# Altium PCB AfternoonCape_RevA2_ADImux.PcbDoc
Units mil, origin at the board's own origin, x right, y up, seen from the top; angles counter-clockwise.
Board outline 3400 x 2150 mil, 2 copper layers (Top Layer, Bottom Layer); 32 components, 108 nets, 343 pads, 63 vias.
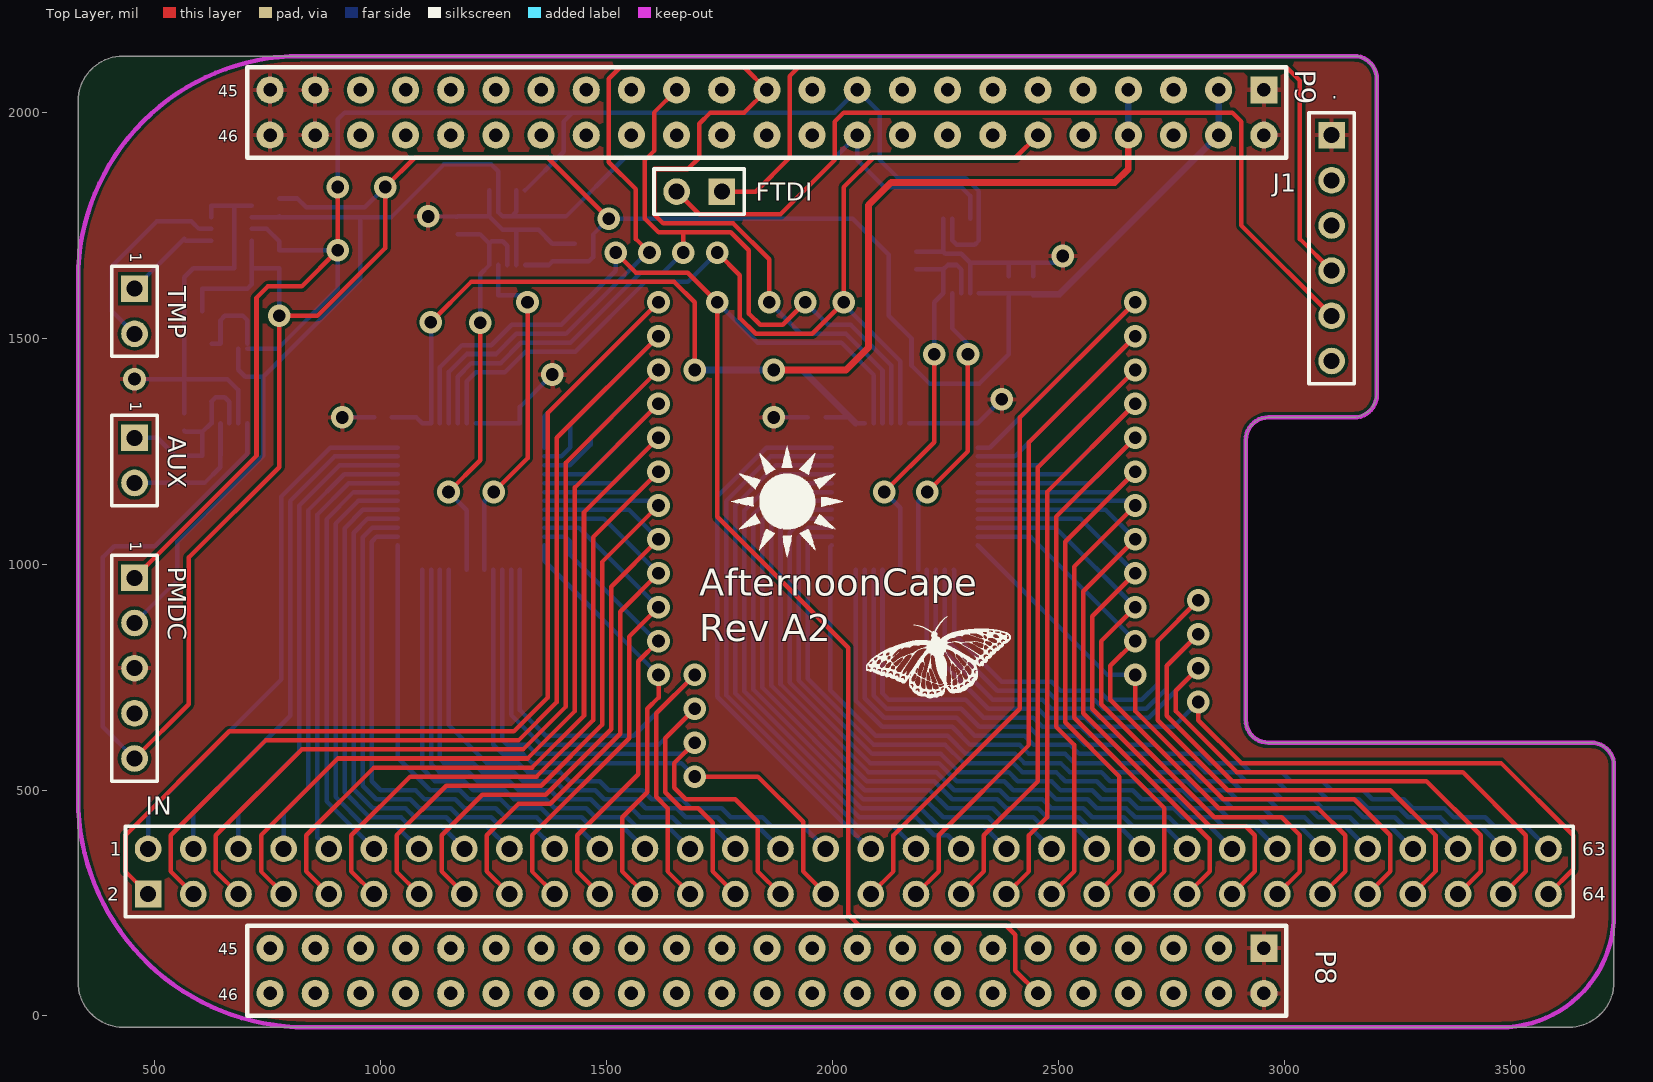
[diagram p0: Top Layer view]
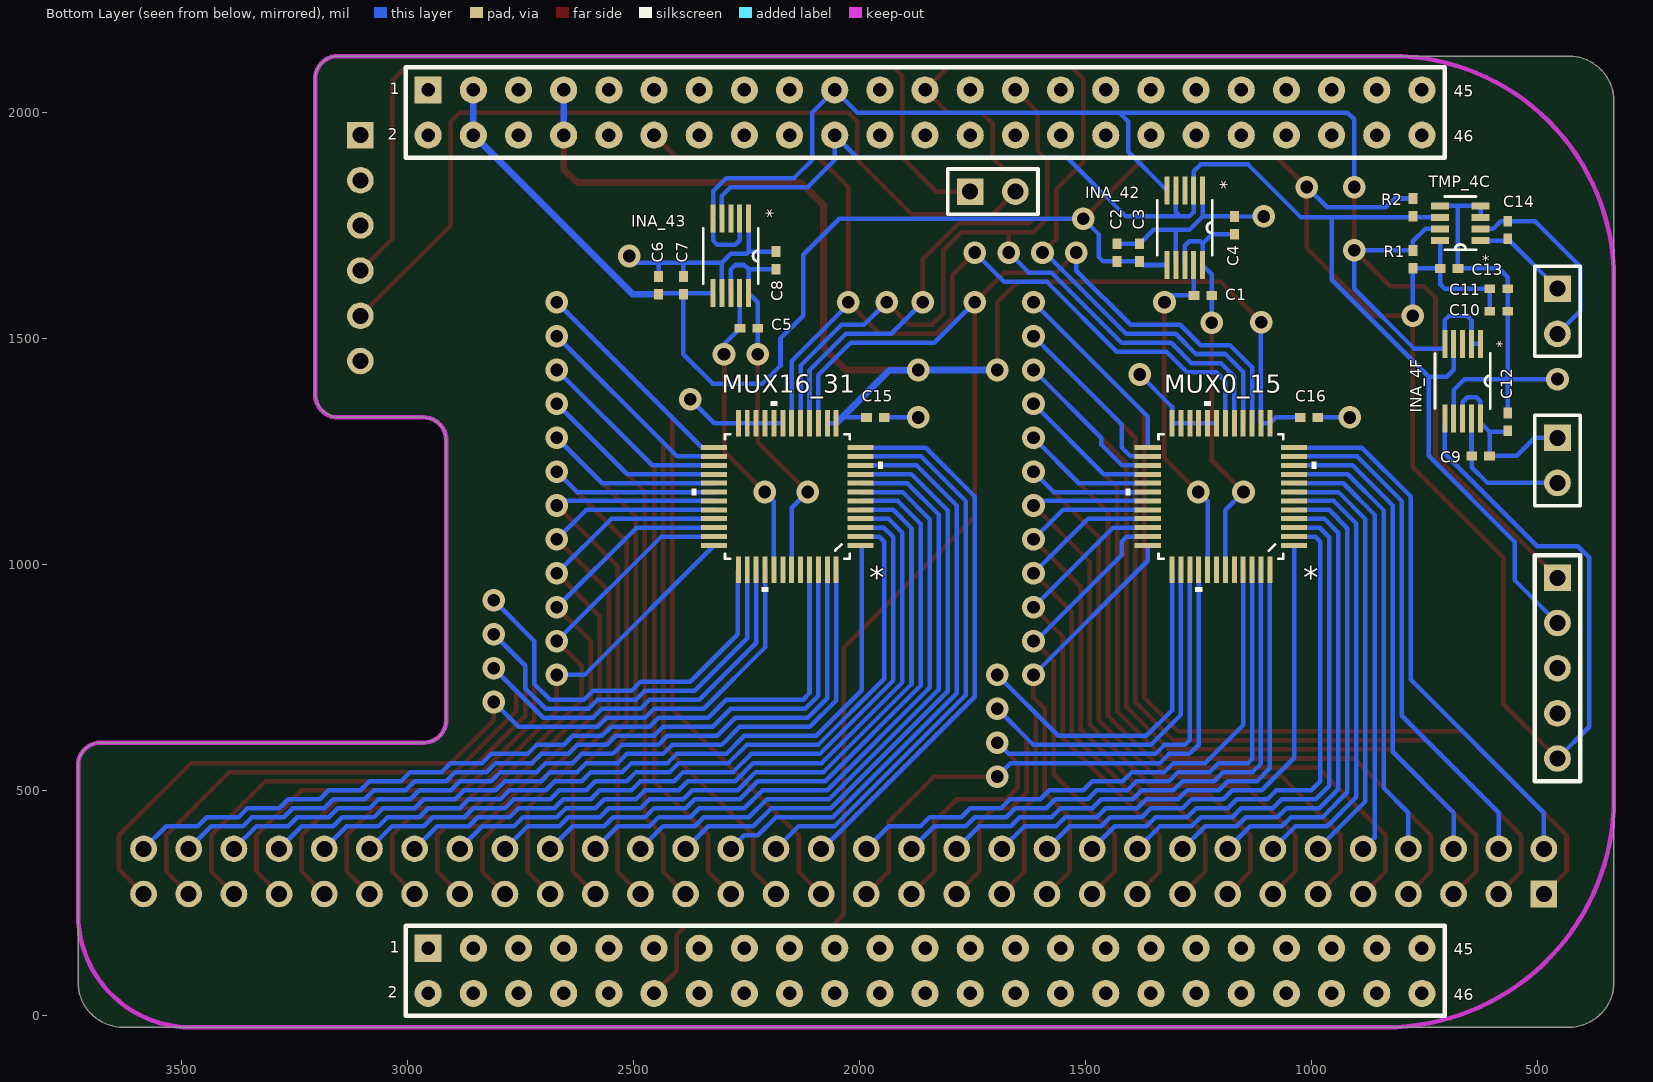
[diagram p1: Bottom Layer view, seen from below]

## Layer stack, top to bottom
Top Layer: signal copper 1.4
Dielectric: dielectric 12.6, FR-4, Dk 4.8
Bottom Layer: signal copper 1.4

## Board outline
3150,2125 3155,2125 cw(c3155,2075) 3205,2075 3205,1380 cw(c3150,1380) 3150,1325 2965,1325 ccw(c2965,1275) 2915,1275 2915,665 2915,655 ccw(c2965,655) 2965,605 3670,605 3680,605 cw(c3680,555) 3730,555 3730,75 cw(c3630,75) 3630,-25 3480,-25 430,-25 cw(c430,75) 330,75 330,530 330,2025 cw(c430,2025) 430,2125 845,2125 3150,2125

## Design rules (kind name [scope] priority, off if disabled: settings)
Clearance [All] p1: gap=7
MinimumSolderMaskSliver [All] p1: minsoldermaskwidth=0
PolygonConnect [All] p1: connectstyle=Relief reliefconductorwidth=10 reliefentries=4 polygonreliefangle="90 Angle"
RoomDefinition AfternoonCape_RevA2_ADImux [InComponentClass('AfternoonCape_RevA2_ADImux')] p1: confinementstyle=ConfineIn formatcopy=TRUE lockcomponents=FALSE outline -190,-755 4780,-755 4780,3205 -190,3205
RoutingVias [All] p1: holewidth=28 width=50 viastyle="Through Hole" minholewidth=28 minwidth=50 maxholewidth=28 maxwidth=50
SilkscreenOverComponentPads [All] p1: minsilkscreentomaskgap=10
SolderMaskExpansion [All] p1: expansion=4
Width [All] p1: maxlimit=20 minlimit=10 preferedwidth=10
26 further rules are at their usual default settings.

## Components (designator, comment, footprint, x,y, rotation, side; value= is the part's Value field where it differs from the comment)
AUX "Header 2" HDR1X2 455,1280 r270 top
C1 "Cap Semi" 0402 1240,1595 r180 bottom
C2 "Cap Semi" 0402 1430,1690 r270 bottom
C3 "Cap Semi" 0402 1380,1690 r270 bottom
C4 "Cap Semi" 0402 1170,1750 r270 bottom
C5 "Cap Semi" 0402 2245,1522.5 r180 bottom
C6 "Cap Semi" 0402 2445,1617.5 r270 bottom
C7 "Cap Semi" 0402 2390,1617.5 r270 bottom
C8 "Cap Semi" 0402 2185,1672.5 r270 bottom
C9 "Cap Semi" 0402 625,1240 r180 bottom
C10 "Cap Semi" 0402 585,1560 r0 bottom
C11 "Cap Semi" 0402 585,1610 r0 bottom
C12 "Cap Semi" 0402 565,1315 r270 bottom
C13 "Cap Semi" 0402 695,1655 r0 bottom
C14 "Cap Semi" 0402 565,1740 r270 bottom
C15 "Cap Semi" 0402 1965,1325 r0 bottom
C16 "Cap Semi" 0402 1005,1325 r0 bottom
FTDI "Header 2" HDR1X2 1755,1825 r180 top
IN "Header 32x2" HDR2X32 485,270 r0 top
INA_4F "INA226" DGS10 665,1405.63 r270 bottom
INA_42 "INA226" DGS10 1280,1745 r270 bottom
INA_43 "INA226" DGS10 2285,1682.5 r270 bottom
J1 "Header 6" HDR1X6 3105,1950 r270 top
MUX0_15 "ADG726BSUZ" SU_48 1200,1150 r0 bottom
MUX16_31 "ADG726BSUZ" SU_48 2160,1150 r0 bottom
P8 "FEMALE HEADER 2x23" HEADER23X2 1855,100 r180 top
P9 "FEMALE HEADER 2x23" HEADER23X2 1855,2000 r180 top
PMDC "Header 5" HDR1X5 455,970 r270 top
R1 "Res3" 0402 775,1675 r270 bottom
R2 "Res3" 0402 775,1790 r90 bottom
TMP "Header 2" HDR1X2 455,1610 r270 top
TMP_4C "TMP441_DCN_8" DCN8-L 670,1755 r0 bottom

## Footprints (in the part's own frame and the unit in brackets; to place one, negate y for a bottom-side part, rotate by r counter-clockwise, add the part's x,y. Pads: shape width x height; smd on the part's side, far side on the other; paste and mask are expansions set on the pad)
0402 [mm] "Chip Capacitor, Body 1.0x0.5mm, IPC High Density"
  rect 0.6x0.5 smd: 1(-0.5,0) 2(0.5,0)
  body extent -0.55,-0.3 0.55,0.3, height 1.3
DCN8-L [mil]
  rect 40x15 smd: 1(-45,38.39) 2(-45,12.8) 3(-45,-12.8) 4(-45,-38.39) 5(45,-38.39) 6(45,-12.8) 7(45,12.8) 8(45,38.39)
  silkscreen extent -34,-59 35,59
DGS10 [mil]
  rect 62x11 smd: 1(-82.5,39.37) 2(-82.5,19.68) 3(-82.5,0) 4(-82.5,-19.68) 5(-82.5,-39.37) 6(82.5,-39.37) 7(82.5,-19.68) 8(82.5,0) 9(82.5,19.68) 10(82.5,39.37)
  silkscreen extent -61,-61 61,61, body extent -96,-59 97,59, height 37
HDR1X2 [mm] "Connector; Header; 2 Position"
  rect 1.5x1.5 hole 0.9: 1(0,0)
  round 1.5 hole 0.9: 2(2.54,0)
  silkscreen extent -1.27,-1.27 3.81,1.27
HDR1X5 [mm] "Connector; Header; 5 Position"
  rect 1.5x1.5 hole 0.9: 1(0,0)
  round 1.5 hole 0.9: 2(2.54,0) 3(5.08,0) 4(7.62,0) 5(10.16,0)
  silkscreen extent -1.27,-1.27 11.43,1.27
HDR1X6 [mm] "Connector; Header; 6 Position"
  rect 1.5x1.5 hole 0.9: 1(0,0)
  round 1.5 hole 0.9: 2(2.54,0) 3(5.08,0) 4(7.62,0) 5(10.16,0) 6(12.7,0)
  silkscreen extent -1.27,-1.27 13.97,1.27
HDR2X32 [mm]
  rect 1.5x1.5 hole 0.9: 1(0,0)
  round 1.5 hole 0.9: 2(0,2.54) 3(2.54,0) 4(2.54,2.54) 5(5.08,0) 6(5.08,2.54) 7(7.62,0) 8(7.62,2.54) 9(10.16,0) 10(10.16,2.54) 11(12.7,0) 12(12.7,2.54) 13(15.24,0) 14(15.24,2.54) 15(17.78,0) 16(17.78,2.54) 17(20.32,0) 18(20.32,2.54) 19(22.86,0) 20(22.86,2.54) 21(25.4,0) 22(25.4,2.54) 23(27.94,0) 24(27.94,2.54) 25(30.48,0) 26(30.48,2.54) 27(33.02,0) 28(33.02,2.54) 29(35.56,0) 30(35.56,2.54) 31(38.1,0) 32(38.1,2.54) 33(40.64,0) 34(40.64,2.54) 35(43.18,0) 36(43.18,2.54) 37(45.72,0) 38(45.72,2.54) 39(48.26,0) 40(48.26,2.54) 41(50.8,0) 42(50.8,2.54) 43(53.34,0) 44(53.34,2.54) 45(55.88,0) 46(55.88,2.54) 47(58.42,0) 48(58.42,2.54) 49(60.96,0) 50(60.96,2.54) 51(63.5,0) 52(63.5,2.54) 53(66.04,0) 54(66.04,2.54) 55(68.58,0) 56(68.58,2.54) 57(71.12,0) 58(71.12,2.54) 59(73.66,0) 60(73.66,2.54) 61(76.2,0) 62(76.2,2.54) 63(78.74,0) 64(78.74,2.54)
  silkscreen extent -1.27,-1.27 80.14,3.81
HEADER23X2 [mil] "HEADER23X2"
  rect 60x60 hole 30 mask+2: 1(-1100,-50)
  round 60 hole 30 mask+2: 2(-1100,50) 3(-1000,-50) 4(-1000,50) 5(-900,-50) 6(-900,50) 7(-800,-50) 8(-800,50) 9(-700,-50) 10(-700,50) 11(-600,-50) 12(-600,50) 13(-500,-50) 14(-500,50) 15(-400,-50) 16(-400,50) 17(-300,-50) 18(-300,50) 19(-200,-50) 20(-200,50) 21(-100,-50) 22(-100,50) 23(0,-50) 24(0,50) 25(100,-50) 26(100,50) 27(200,-50) 28(200,50) 29(300,-50) 30(300,50) 31(400,-50) 32(400,50) 33(500,-50) 34(500,50) 35(600,-50) 36(600,50) 37(700,-50) 38(700,50) 39(800,-50) 40(800,50) 41(900,-50) 42(900,50) 43(1000,-50) 44(1000,50) 45(1100,-50) 46(1100,50)
  silkscreen extent -1150,-100 1150,100
SU_48 [mil]
  rect 58x11 smd mask+5: 1(-162,108.27) 2(-162,88.58) 3(-162,68.9) 4(-162,49.21) 5(-162,29.53) 6(-162,9.84) 7(-162,-9.84) 8(-162,-29.53) 9(-162,-49.21) 10(-162,-68.9) 11(-162,-88.58) 12(-162,-108.27) 25(162,-108.27) 26(162,-88.58) 27(162,-68.9) 28(162,-49.21) 29(162,-29.53) 30(162,-9.84) 31(162,9.84) 32(162,29.53) 33(162,49.21) 34(162,68.9) 35(162,88.58) 36(162,108.27)
  rect 11x58 smd mask+5: 13(-108.27,-162) 14(-88.58,-162) 15(-68.9,-162) 16(-49.21,-162) 17(-29.53,-162) 18(-9.84,-162) 19(9.84,-162) 20(29.53,-162) 21(49.21,-162) 22(68.9,-162) 23(88.58,-162) 24(108.27,-162) 37(108.27,162) 38(88.58,162) 39(68.9,162) 40(49.21,162) 41(29.53,162) 42(9.84,162) 43(-9.84,162) 44(-29.53,162) 45(-49.21,162) 46(-68.9,162) 47(-88.58,162) 48(-108.27,162)
  silkscreen extent -211,-211 211,211

## Part data
AUX FTDI TMP: "Header, 2-Pin"
C1 C2 C3 C4 C5 C6 C7 C8 C9 C10 C11 C12 C13 C14 C15 C16: "Capacitor (Semiconductor SIM Model)"
IN: "Header, 32-Pin, Dual row"
J1: "6-pin female header, long legs for FTDI-USB cable"
MUX0_15 MUX16_31 TMP_4C: "Imported"
P8 P9: library part HDR_46_F_2_0.1_0.1, "CONN HEADER FMAL 46PS.1\" DL GOLD"
PMDC: "Header, 5-Pin"
R1 R2: "Resistor"

## Via types
v1: diameter 50, hole 28, Top Layer to Bottom Layer, 63 vias

## Nets (pads, with @x,y where several pads share a name; then routed paths per layer and width w, separated by ;. In a path a pad name is that pad's centre, name@x,y a point inside that pad or via, vN(x,y) a via of type N, cw(c..) or ccw(c..) an arc to the next point about the centre after c; other vN are vias at no path point)
AIN0: P9.39
AIN1: P9.40
AIN2: P9.37
AIN3: P9.38
ALERT: PMDC.4
AUX_N: AUX.2 C9.1 INA_4F.9 | length 302.1
  Bottom Layer w10: AUX.2 610,1180 644.68,1214.68 C9.1 645.32,1240.63 INA_4F.9@645.32,1312.5
AUX_P: AUX.1 C9.2 C12.2 INA_4F.8 INA_4F.10 | length 432.3
  Bottom Layer w10: AUX.1 505,1280 545,1240 C9.2 605.31,1293 ; C12.2 567.32,1293 605.31,1293 ; INA_4F.10@624.82,1312.5 605.31,1293 ; INA_4F.10@625.63,1312.5 625.63,1359.37 625,1360 635,1370 655,1370 665,1360 INA_4F.8@665,1312.5
B_UART0_RX: FTDI.1 J1.4 | length 1960.8
  Top Layer w10: FTDI.1 1830,1825 1905,1900 1905,2080 1925,2100 3005,2100 3035,2070 3035,1720 J1.4
B_UART0_TX: FTDI.2 J1.5 | length 1934.8
  Top Layer w10: FTDI.2 1705,1775 1885,1775 2005,1895 2005,1980 2025,2000 2885,2000 2905,1980 2905,1750 J1.5
CH0_N: IN.1 MUX0_15.25 | length 2615.1
  Top Layer w10: IN.1 435,320 435,400 665,630 1295,630 1370,705 1370,1335 v1(1615,1580)
  Bottom Layer w10: MUX0_15.25 1362,1327 v1(1615,1580)
CH0_P: IN.2 MUX0_15.12 | length 1205
  Bottom Layer w10: IN.2 485,450 780,745 780,1150 888.27,1258.27 MUX0_15.12
CH1_N: IN.3 MUX0_15.26 | length 2424.3
  Top Layer w10: IN.3 535,320 535,400 745,610 1305,610 1390,695 1390,1280 v1(1615,1505)
  Bottom Layer w10: MUX0_15.26 1399.54,1238.58 1420,1259.04 1420,1310 v1(1615,1505)
CH1_P: IN.4 MUX0_15.11 | length 1137.9
  Bottom Layer w10: IN.4 585,450 800,665 800,1140 898.58,1238.58 MUX0_15.11
CH2_N: IN.5 MUX0_15.27 | length 2222.9
  Top Layer w10: IN.5 635,320 635,400 825,590 1315,590 1410,685 1410,1225 v1(1615,1430)
  Bottom Layer w10: MUX0_15.27 1418.9,1218.9 1465,1265 1465,1280 v1(1615,1430)
CH2_P: IN.6 MUX0_15.10 | length 1070.7
  Bottom Layer w10: IN.6 685,450 820,585 820,1130 908.9,1218.9 MUX0_15.10
CH3_N: IN.7 MUX0_15.28 | length 2033.8
  Top Layer w10: IN.7 735,320 735,400 905,570 1325,570 1430,675 1430,1170 v1(1615,1355)
  Bottom Layer w10: MUX0_15.28 1459.21,1199.21 v1(1615,1355)
CH3_P: IN.8 MUX0_15.9 | length 1003.6
  Bottom Layer w10: IN.8 785,450 840,505 840,1120 919.21,1199.21 MUX0_15.9
CH4_N: IN.9 MUX0_15.29 | length 1853.4
  Top Layer w10: IN.9 835,320 835,400 985,550 1335,550 1450,665 1450,1115 v1(1615,1280)
  Bottom Layer w10: MUX0_15.29 1514.53,1179.53 v1(1615,1280)
CH4_P: IN.10 MUX0_15.8 | length 957.2
  Bottom Layer w10: IN.10 860,395 860,1110 929.53,1179.53 MUX0_15.8
CH5_N: IN.11 MUX0_15.30 | length 1673.1
  Top Layer w10: IN.11 935,320 935,400 1065,530 1345,530 1470,655 1470,1060 v1(1615,1205)
  Bottom Layer w10: MUX0_15.30 1569.84,1159.84 v1(1615,1205)
CH5_P: IN.12 MUX0_15.7 | length 956.3
  Bottom Layer w10: IN.12 880,475 880,1100 939.84,1159.84 MUX0_15.7
CH6_N: IN.13 MUX0_15.31 | length 1501.2
  Top Layer w10: IN.13 1035,320 1035,400 1145,510 1355,510 1490,645 1490,1005 v1(1615,1130)
  Bottom Layer w10: MUX0_15.31 1604.84,1140.16 v1(1615,1130)
CH6_P: IN.14 MUX0_15.6 | length 996.4
  Bottom Layer w10: MUX0_15.6 950.16,1140.16 900,1090 900,485 965,420 1035,420 IN.14
CH7_N: IN.15 MUX0_15.32 | length 1366.7
  Top Layer w10: IN.15 1135,320 1135,400 1225,490 1365,490 1510,635 1510,950 v1(1615,1055)
  Bottom Layer w10: MUX0_15.32 1549.53,1120.47 v1(1615,1055)
CH7_P: IN.16 MUX0_15.5 | length 1036.5
  Bottom Layer w10: MUX0_15.5 960.47,1120.47 920,1080 920,495 975,440 1045,440 1065,420 1135,420 IN.16
CH8_N: IN.17 MUX0_15.33 | length 1232.1
  Top Layer w10: IN.17 1235,320 1235,400 1305,470 1375,470 1530,625 1530,895 v1(1615,980)
  Bottom Layer w10: MUX0_15.33 1494.21,1100.79 v1(1615,980)
CH8_P: IN.18 MUX0_15.4 | length 1078.4
  Bottom Layer w10: MUX0_15.4 970.79,1100.79 940,1070 940,502 982,460 1055,460 1075,440 1145,440 1165,420 1235,420 IN.18
CH9_N: IN.19 MUX0_15.34 | length 1097.6
  Top Layer w10: IN.19 1335,320 1335,400 1550,615 1550,840 v1(1615,905)
  Bottom Layer w10: MUX0_15.34 1438.9,1081.1 v1(1615,905)
CH9_P: IN.20 MUX0_15.3 | length 1119.7
  Bottom Layer w10: MUX0_15.3 981.1,1081.1 960,1060 960,510 990,480 1065,480 1085,460 1155,460 1175,440 1245,440 1265,420 1335,420 IN.20
CH10_N: IN.21 MUX0_15.35 | length 1021.7
  Top Layer w10: IN.21 1435,320 1435,400 1570,535 1570,785 v1(1615,830)
  Bottom Layer w10: MUX0_15.35 1408.58,1061.42 1420,1050 1420,1020 1610,830 v1(1615,830)
CH10_P: IN.22 MUX0_15.2 | length 1159.9
  Bottom Layer w10: MUX0_15.2 991.42,1061.42 980,1050 980,520 1000,500 1077,500 1097,480 1165,480 1185,460 1255,460 1275,440 1345,440 1365,420 1435,420 IN.22
CH11_N: IN.23 MUX0_15.36 | length 930.4
  Top Layer w10: IN.23 1535,320 1535,440 1590,495 1590,680 1615,705 v1(1615,755)
  Bottom Layer w10: MUX0_15.36 1362,1008 v1(1615,755)
CH11_P: IN.24 MUX0_15.1 | length 1100.4
  Bottom Layer w10: MUX0_15.1 1038,572 1110,500 1175,500 1195,480 1265,480 1285,460 1355,460 1375,440 1445,440 1465,420 1535,420 IN.24
CH12_N: IN.25 MUX0_15.37 | length 1328.7
  Top Layer w10: IN.25 1635,320 1635,460 1610,485 1610,670 v1(1695,755)
  Bottom Layer w10: MUX0_15.37 1308.27,676.73 1365,620 1560,620 v1(1695,755)
CH12_P: IN.26 MUX0_15.48 | length 1106.8
  Bottom Layer w10: MUX0_15.48 1091.73,548.27 1120,520 1185,520 1205,500 1275,500 1295,480 1365,480 1385,460 1455,460 1475,440 1545,440 1565,420 1635,420 IN.26
CH13_N: IN.27 MUX0_15.38 | length 1312
  Top Layer w10: v1(1695,680) 1630,615 1630,495 1665,460 1703,460 1735,428 1735,320 IN.27
  Bottom Layer w10: MUX0_15.38 1288.58,666.42 1355,600 1615,600 v1(1695,680)
CH13_P: IN.28 MUX0_15.47 | length 1181.1
  Bottom Layer w10: MUX0_15.47 1111.42,558.58 1130,540 1195,540 1215,520 1285,520 1305,500 1375,500 1395,480 1465,480 1485,460 1555,460 1575,440 1645,440 1665,420 1735,420 IN.28
CH14_N: IN.29 MUX0_15.39 | length 1341.7
  Top Layer w10: v1(1695,605) 1650,560 1650,505 1675,480 1785,480 1835,430 1835,320 IN.29
  Bottom Layer w10: MUX0_15.39 1268.9,611.1 1280,600 1325,600 1345,580 1670,580 v1(1695,605)
CH14_P: IN.30 MUX0_15.46 | length 1255.4
  Bottom Layer w10: MUX0_15.46 1131.1,568.9 1140,560 1205,560 1225,540 1295,540 1315,520 1387,520 1407,500 1475,500 1495,480 1567,480 1587,460 1655,460 1675,440 1745,440 1765,420 1835,420 IN.30
CH15_N: IN.31 MUX0_15.40 | length 1324.5
  Top Layer w10: v1(1695,530) 1835,530 1935,430 1935,320 IN.31
  Bottom Layer w10: MUX0_15.40 1249.21,600.79 1270,580 1315,580 1335,560 1665,560 v1(1695,530)
CH15_P: IN.32 MUX0_15.45 | length 1291.6
  Bottom Layer w10: MUX0_15.45 1150.79,644.21 1235,560 1305,560 1325,540 1397,540 1417,520 1485,520 1505,500 1580,500 1600,480 1667,480 1687,460 1755,460 1775,440 1845,440 1865,420 1935,420 IN.32
CH16_N: IN.33 MUX16_31.25 | length 2033.6
  Top Layer w10: IN.33 2135,320 2135,400 2415,680 2415,1325 v1(2670,1580)
  Bottom Layer w10: MUX16_31.25 2348.27,1258.27 v1(2670,1580)
CH16_P: IN.34 MUX16_31.12 | length 1220.7
  Bottom Layer w10: MUX16_31.12 1853.27,1258.27 1745,1150 1745,706.5 2081.5,370 IN.34
CH17_N: IN.35 MUX16_31.26 | length 1894.2
  Top Layer w10: IN.35 2235,320 2235,400 2435,600 2435,1270 v1(2670,1505)
  Bottom Layer w10: MUX16_31.26 2403.58,1238.58 v1(2670,1505)
CH17_P: IN.36 MUX16_31.11 | length 1264.3
  Bottom Layer w10: MUX16_31.11 1863.58,1238.58 1765,1140 1765,710.54 2055.54,420 2135,420 IN.36
CH18_N: IN.37 MUX16_31.27 | length 1754.9
  Top Layer w10: IN.37 2335,320 2335,400 2455,520 2455,1215 v1(2670,1430)
  Bottom Layer w10: MUX16_31.27 2458.9,1218.9 v1(2670,1430)
CH18_P: IN.38 MUX16_31.10 | length 1308
  Bottom Layer w10: MUX16_31.10 1873.9,1218.9 1785,1130 1785,714.58 2059.58,440 2185,440 2225,400 2255,400 IN.38
CH19_N: IN.39 MUX16_31.28 | length 1615.6
  Top Layer w10: IN.39 2435,320 2435,400 2475,440 2475,1160 v1(2670,1355)
  Bottom Layer w10: MUX16_31.28 2514.21,1199.21 v1(2670,1355)
CH19_P: IN.40 MUX16_31.9 | length 1351
  Bottom Layer w10: MUX16_31.9 1885.17,1199.21 1805,1119.04 1805,718.63 2063.63,460 2195,460 2235,420 2335,420 IN.40
CH20_N: IN.41 MUX16_31.29 | length 1509.4
  Top Layer w10: IN.41 2535,320 2535,600 2495,640 2495,1105 v1(2670,1280)
  Bottom Layer w10: MUX16_31.29 2569.53,1179.53 v1(2670,1280)
CH20_P: IN.42 MUX16_31.8 | length 1395.2
  Bottom Layer w10: MUX16_31.8 1894.53,1179.53 1825,1110 1825,722.67 2067.67,480 2205,480 2245,440 2345,440 2365,420 2435,420 IN.42
CH21_N: IN.43 MUX16_31.30 | length 1436.3
  Top Layer w10: IN.43 2635,320 2635,530 2515,650 2515,1050 v1(2670,1205)
  Bottom Layer w10: MUX16_31.30 2624.84,1159.84 v1(2670,1205)
CH21_P: IN.44 MUX16_31.7 | length 1438.8
  Bottom Layer w10: MUX16_31.7 1904.84,1159.84 1845,1100 1845,726.71 2071.71,500 2215,500 2255,460 2355,460 2375,440 2445,440 2465,420 2535,420 IN.44
CH22_N: IN.45 MUX16_31.31 | length 1371.7
  Top Layer w10: v1(2670,1130) 2535,995 2535,660 2735,460 2735,320 IN.45
  Bottom Layer w10: MUX16_31.31 2659.84,1140.16 v1(2670,1130)
CH22_P: IN.46 MUX16_31.6 | length 1482.5
  Bottom Layer w10: MUX16_31.6 1915.16,1140.16 1865,1090 1865,730.75 2075.75,520 2225,520 2265,480 2365,480 2385,460 2455,460 2475,440 2545,440 2565,420 2635,420 IN.46
CH23_N: IN.47 MUX16_31.32 | length 1344.4
  Top Layer w10: v1(2670,1055) 2555,940 2555,670 2835,390 2835,320 IN.47
  Bottom Layer w10: MUX16_31.32 2604.53,1120.47 v1(2670,1055)
CH23_P: IN.48 MUX16_31.5 | length 1526.1
  Bottom Layer w10: MUX16_31.5 1925.47,1120.47 1885,1080 1885,734.79 2079.79,540 2230,540 2270,500 2370,500 2390,480 2465,480 2485,460 2555,460 2575,440 2645,440 2665,420 2735,420 IN.48
CH24_N: IN.49 MUX16_31.33 | length 1364.1
  Top Layer w10: v1(2670,980) 2575,885 2575,680 2835,420 2915,420 2935,400 2935,320 IN.49
  Bottom Layer w10: MUX16_31.33 2549.21,1100.79 v1(2670,980)
CH24_P: IN.50 MUX16_31.4 | length 1569.7
  Bottom Layer w10: MUX16_31.4 1935.79,1100.79 1905,1070 1905,738.83 2083.83,560 2235,560 2275,520 2380,520 2400,500 2475,500 2495,480 2565,480 2585,460 2650,460 2670,440 2745,440 2765,420 2835,420 IN.50
CH25_N: IN.51 MUX16_31.34 | length 1377.8
  Top Layer w10: v1(2670,905) 2595,830 2595,690 2845,440 2995,440 3035,400 3035,320 IN.51
  Bottom Layer w10: MUX16_31.34 2493.9,1081.1 v1(2670,905)
CH25_P: IN.52 MUX16_31.3 | length 1613.3
  Bottom Layer w10: MUX16_31.3 1946.1,1081.1 1925,1060 1925,742.88 2087.88,580 2240,580 2280,540 2390,540 2410,520 2485,520 2505,500 2575,500 2595,480 2656,480 2676,460 2755,460 2775,440 2845,440 2865,420 2935,420 IN.52
CH26_N: IN.53 MUX16_31.35 | length 1391.6
  Top Layer w10: v1(2670,830) 2615,775 2615,700 2855,460 3075,460 3135,400 3135,320 IN.53
  Bottom Layer w10: MUX16_31.35 2438.58,1061.42 v1(2670,830)
CH26_P: IN.54 MUX16_31.2 | length 1656.9
  Bottom Layer w10: MUX16_31.2 1956.42,1061.42 1945,1050 1945,746.92 2091.92,600 2250,600 2290,560 2400,560 2420,540 2495,540 2515,520 2585,520 2605,500 2665,500 2685,480 2765,480 2785,460 2855,460 2875,440 2945,440 2965,420 3035,420 IN.54
CH27_N: IN.55 MUX16_31.36 | length 1376.4
  Top Layer w10: v1(2670,755) 2670,675 2865,480 3155,480 3235,400 3235,320 IN.55
  Bottom Layer w10: MUX16_31.36 2608.73,755 v1(2670,755)
CH27_P: IN.56 MUX16_31.1 | length 1657.4
  Bottom Layer w10: MUX16_31.1 1995,1038.73 1995,720.96 2095.96,620 2255,620 2295,580 2405,580 2425,560 2505,560 2525,540 2595,540 2615,520 2675,520 2695,500 2775,500 2795,480 2865,480 2885,460 2955,460 2975,440 3045,440 3065,420 3135,420 IN.56
CH28_N: IN.57 MUX16_31.37 | length 2064.2
  Top Layer w10: v1(2810,920) 2720,830 2720,655 2875,500 3235,500 3335,400 3335,320 IN.57
  Bottom Layer w10: MUX16_31.37 2270,986.27 2270,845 2375,740 2485,740 2505,720 2590,720 2610,700 2685,700 2720,735 2720,830 v1(2810,920)
CH28_P: IN.58 MUX16_31.48 | length 1659
  Bottom Layer w10: MUX16_31.48 2051.73,698.27 2110,640 2265,640 2305,600 2415,600 2435,580 2515,580 2535,560 2605,560 2625,540 2685,540 2705,520 2785,520 2805,500 2875,500 2895,480 2965,480 2985,460 3055,460 3075,440 3145,440 3165,420 3235,420 IN.58
CH29_N: IN.59 MUX16_31.38 | length 2039.9
  Top Layer w10: v1(2810,845) 2740,775 2740,665 2885,520 3315,520 3435,400 3435,320 IN.59
  Bottom Layer w10: MUX16_31.38 2248.58,836.42 2365,720 2475,720 2495,700 2580,700 2600,680 2695,680 2740,725 2740,775 v1(2810,845)
CH29_P: IN.60 MUX16_31.47 | length 1736.2
  Bottom Layer w10: MUX16_31.47 2071.42,703.58 2115,660 2275,660 2315,620 2426,620 2446,600 2526,600 2546,580 2615,580 2635,560 2695,560 2715,540 2795,540 2815,520 2885,520 2905,500 2975,500 2995,480 3065,480 3085,460 3155,460 3175,440 3245,440 3265,420 3335,420 IN.60
CH30_N: IN.61 MUX16_31.39 | length 2012.7
  Top Layer w10: v1(2810,770) 2760,720 2760,675 2895,540 3395,540 3535,400 3535,320 IN.61
  Bottom Layer w10: MUX16_31.39 2228.9,826.1 2355,700 2465,700 2485,680 2570,680 2590,660 2700,660 v1(2810,770)
CH30_P: IN.62 MUX16_31.46 | length 1813.4
  Bottom Layer w10: MUX16_31.46 2091.1,708.9 2120,680 2285,680 2325,640 2435,640 2455,620 2540,620 2560,600 2625,600 2645,580 2705,580 2725,560 2805,560 2825,540 2895,540 2915,520 2985,520 3005,500 3075,500 3095,480 3165,480 3185,460 3255,460 3275,440 3345,440 3365,420 3435,420 IN.62
CH31_N: IN.63 MUX16_31.40 | length 1997
  Top Layer w10: v1(2810,695) 2810,655 2905,560 3480,560 3640,400 3640,325 IN.63
  Bottom Layer w10: MUX16_31.40 2209.21,815.79 2345,680 2455,680 2475,660 2560,660 2580,640 2755,640 v1(2810,695)
CH31_P: IN.64 MUX16_31.45 | length 1890.6
  Bottom Layer w10: MUX16_31.45 2110.79,714.21 2125,700 2295,700 2335,660 2445,660 2465,640 2550,640 2570,620 2635,620 2655,600 2715,600 2735,580 2815,580 2835,560 2905,560 2925,540 2995,540 3015,520 3085,520 3105,500 3175,500 3195,480 3265,480 3285,460 3355,460 3375,440 3445,440 3465,420 3535,420 IN.64
GND: C2.1 C3.1 C4.1 C6.1 C7.1 C8.1 C10.1 C11.1 C12.1 C13.1 C15.1 C16.1 INA_4F.7 INA_42.1 INA_42.7 INA_43.1 INA_43.7 J1.1 MUX0_15.19 MUX0_15.20 MUX0_15.21 MUX0_15.22 MUX0_15.23 MUX0_15.24 MUX16_31.19 MUX16_31.20 MUX16_31.21 MUX16_31.22 MUX16_31.23 MUX16_31.24 P8.1 P8.2 P9.1 P9.2 P9.43 P9.44 P9.45 P9.46 PMDC.3 TMP_4C.3 TMP_4C.4 TMP_4C.5 | length 2627.2
  Bottom Layer w10: v1(455,1410) 565,1410 ; C12.1 565,1410 ; 565,1635 565,1410 ; 565.32,1410.32 565,1410 ; 565.32,1635.32 585,1655 C13.1 675.32,1793.07 675,1793.39 ; TMP_4C.3 TMP_4C.4 675,1793.39 ; INA_4F.7@684.68,1312.5 INA_4F.7 684.68,1385.95 684.06,1385.95 660,1410 565,1410 ; TMP_4C.5 675,1793.39 ; v1(915,1325) C16.1 ; v1(1105,1770) C4.1 ; C4.1@1166.5,1769.68 C4.1 ; MUX0_15.19 MUX0_15.20 MUX0_15.21 MUX0_15.22 MUX0_15.23 MUX0_15.24 1308.27,1348.27 v1(1380,1420) ; INA_42.1@1239.82,1827.5 1239.82,1770.18 ; INA_42.7 1299.68,1740 ; C2.1 C3.1 1349.68,1740 1299.68,1740 ; v1(1870,1325) C15.1 ; MUX16_31.19 MUX16_31.20 MUX16_31.21 MUX16_31.22 MUX16_31.23 MUX16_31.24 2322,1312 v1(2375,1365) ; C8.1 2245.32,1692.18 2245.63,1691.87 ; INA_43.1 2245.63,1691.87 ; INA_43.7 2304.68,1667.82 ; C7.1 2390,1667.5 2389.68,1667.82 ; C6.1 2445,1667.5 2444.68,1667.82 ; v1(2510,1682.5) 2495.32,1667.82 2444.68,1667.82 ; C4.1 1170.5,1770.18 1239.82,1770.18 ; 1239.82,1770.18 1270,1740 1299.68,1740 ; 2245.63,1691.87 2250,1687.5 2285,1687.5 2304.68,1667.82 ; 2304.68,1667.82 2389.68,1667.82 ; 2389.68,1667.82 2444.68,1667.82
I2C2_SCL: INA_4F.1 INA_4F.2 INA_4F.5 INA_42.5 INA_43.2 INA_43.5 P9.19 PMDC.1 R1.1 TMP_4C.7 | length 4039.4
  Top Layer w10: PMDC.1 725,1240 725,1590 750,1615 825,1615 v1(905,1695) v1(905,1835)
  Bottom Layer w10: INA_4F.1 INA_4F.2 645.32,1540.32 655,1550 695,1550 704.37,1540.63 INA_4F.5 ; INA_4F.5@704.37,1477.5 772.5,1477.5 905,1610 v1(905,1695) 775.31,1695 R1.1 775,1715 747.8,1742.2 TMP_4C.7 ; v1(905,1835) 905,1985 920,2000 1425,2000 ; INA_42.5 1405,1913.13 1405,1980 1425,2000 ; INA_43.2 2265.32,1717.18 2275,1707.5 2315,1707.5 2324.37,1716.87 INA_43.5 2324.37,1825.63 2295,1855 2145,1855 2105,1895 2105,2000 P9.19 2005,2000 1425,2000
I2C2_SDA: INA_4F.4 INA_42.2 INA_42.4 INA_43.4 P9.20 PMDC.2 R2.1 TMP_4C.6 | length 3230.6
  Bottom Layer w10: PMDC.2 550,965 550,1050 740,1240 740,1415 ; INA_4F.4@684.68,1477.5 684.68,1430.32 700,1415 740,1415 ; TMP_4C.6 R2.1@772.48,1767.8 ; R2.1 R2.1@772.48,1767.8 ; INA_42.4 1299.68,1780.32 1300,1780 1290,1770 ; INA_43.4 2304.68,1815.32 2285,1835 2115,1835 2055,1895 P9.20 2005,1900 1540,1900 1410,1770 1290,1770 ; 740,1415 955,1630 955,1767.8 ; R2.1@772.48,1767.8 955,1767.8 ; 955,1767.8 1022.8,1767.8 1140,1885 1245,1885 1260.32,1869.68 INA_42.2 1260.32,1779.68 1270,1770 1290,1770
LCD_DATA0: P8.45
LCD_DATA1: P8.46
LCD_DATA2: P8.43
LCD_DATA3: P8.44
LCD_DATA4: P8.41
LCD_DATA5: P8.42
LCD_DATA6: P8.39
LCD_DATA7: P8.40
LCD_DATA8: P8.37
LCD_DATA9: P8.38
LCD_DATA10: P8.36
LCD_DATA11: P8.34
LCD_DATA12: P8.35
LCD_DATA13: P8.33
LCD_DATA14: P8.31
LCD_DATA15: P8.32
LCD_HSYNC: P8.29
LCD_PCLK: P8.28
LCD_VSYNC: P8.27
MUX1_N: C1.1 INA_42.9 MUX0_15.41 | length 770.8
  Top Layer w10: v1(1250,1160) 1325,1235 v1(1325,1580)
  Bottom Layer w10: MUX0_15.41 1229.53,1139.53 v1(1250,1160) ; INA_42.9 1260.32,1595.63 C1.1 1310,1595 v1(1325,1580)
MUX1_P: C1.2 C4.2 INA_42.8 INA_42.10 MUX0_15.43 | length 942.7
  Top Layer w10: v1(1150,1160) 1220,1230 v1(1220,1535)
  Bottom Layer w10: v1(1150,1160) 1190.16,1119.84 MUX0_15.43 ; C4.2 1219.69,1730.31 1240.63,1709.37 ; v1(1220,1535) C1.2@1220,1594.69 ; C1.2 1220.31,1642.18 INA_42.10 1240.63,1709.37 ; INA_42.8 1280,1705 1270,1715 1246.26,1715 1240.63,1709.37
MUX2_N: C5.1 INA_43.9 MUX16_31.41 | length 672.6
  Top Layer w10: v1(2210,1160) 2300,1250 v1(2300,1465)
  Bottom Layer w10: MUX16_31.41 2189.53,1139.53 v1(2210,1160) ; INA_43.9 2264.68,1599.37 C5.1 2300,1487.19 v1(2300,1465)
MUX2_P: C5.2 C8.2 INA_43.8 INA_43.10 MUX16_31.43 | length 894.5
  Top Layer w10: v1(2115,1160) 2225,1270 v1(2225,1465)
  Bottom Layer w10: v1(2115,1160) 2150.16,1124.84 MUX16_31.43 ; C8.2 2245.31,1652.81 2245.63,1653.13 ; v1(2225,1465) 2225,1522.19 C5.2 2225.31,1579.69 INA_43.10 2245.63,1653.13 ; INA_43.8 2285,1652.5 2275,1662.5 2255,1662.5 2245.63,1653.13
MUX_SEL0: MUX0_15.15 MUX16_31.15 P8.12 | length 3466.4
  Top Layer w10: v1(1520,1690) 1565,1645 1680,1645 v1(1745,1580) ; v1@1745,1600 v1(1745,1580) ; P8.12 2405,100 2405,180 2385,200 2060,200 2035,225 2035,815 1745,1105 v1(1745,1580)
  Bottom Layer w10: MUX0_15.15 1131.1,1436.1 1180,1485 1245,1485 1290,1530 1400,1530 1520,1650 v1(1520,1690) ; v1(1745,1580) 1835,1490 2020,1490 2091.1,1418.9 MUX16_31.15
MUX_SEL1: MUX0_15.16 MUX16_31.16 P9.23 | length 2759.1
  Top Layer w10: v1(1595,1690) 1565,1720 1565,1830 1505,1890 1505,2075 1530,2100 1805,2100 P9.23 1805,2000 1730,2000 1705,1975 1705,1900 1680,1875 1605,1875 1605,1775 1625,1755 1780,1755 1860,1675 v1(1860,1580)
  Bottom Layer w10: MUX0_15.16 1150.79,1425.79 1190.48,1465.48 1255.48,1465.48 1300,1510 1410,1510 1590,1690 v1(1595,1690) ; v1(1860,1580) 1930,1510 2030,1510 2110.79,1429.21 MUX16_31.16
MUX_SEL2: MUX0_15.17 MUX16_31.17 P9.27 | length 2007
  Top Layer w10: P9.27 1605,2000 1605,1915 1585,1895 1585,1765 1615,1735 1670,1735 ; v1(1670,1690) 1670,1735 ; v1(1940,1580) 1890,1530 1840,1530 1815,1555 1815,1695 1775,1735 1670,1735
  Bottom Layer w10: MUX0_15.17 1170.47,1415.47 1200.48,1445.48 1265.48,1445.48 1310,1490 1420,1490 1575,1645 1625,1645 v1(1670,1690) ; v1(1940,1580) 1990,1530 2040,1530 2130,1440 2130,1312.47 MUX16_31.17
MUX_SEL3: MUX0_15.18 MUX16_31.18 P9.12 | length 2257.7
  Top Layer w10: v1(1745,1690) 1795,1640 1795,1545 1830,1510 1955,1510 v1(2025,1580) 2025,1835 2090,1900 2405,1900 P9.12
  Bottom Layer w10: MUX0_15.18 1190.16,1405.16 1210,1425 1275,1425 1320.48,1470.48 1430.48,1470.48 1585,1625 1680,1625 v1(1745,1690) ; v1(2025,1580) 2025,1575 2150.16,1449.84 MUX16_31.18
PADN: C14.1 TMP.2 TMP_4C.2 | length 439.2
  Bottom Layer w10: TMP.2 405,1560 405,1660 504.68,1759.68 C14.1 580.32,1759.68 597.8,1742.2 TMP_4C.2
PADP: C14.2 TMP.1 TMP_4C.1 | length 217.4
  Bottom Layer w10: TMP.1 455,1610.32 C14.2 568.7,1716.61 TMP_4C.1
SYS_5V: C15.2 C16.2 MUX0_15.13 MUX0_15.14 MUX16_31.13 MUX16_31.14 P9.7 P9.8 | length 2919.4
  Top Layer w10: v1(1111.1,1536.1) 1200,1625 1650,1625 1695,1580 v1(1695,1430)
  Top Layer w15: v1(1870,1430) 2030,1430 2080,1480 2080,1795 2130,1845 2625,1845 2655,1875 P9.8
  Bottom Layer w10: C16.2 1078.73,1325 MUX0_15.13 MUX0_15.14 1111.42,1535.79 v1(1111.1,1536.1) ; C15.2 2038.73,1325 ; MUX16_31.13 MUX16_31.14
  Bottom Layer w15: v1(1111.1,1536.1) v1@1115,1540 ; v1(1695,1430) v1(1870,1430) 1870.63,1429.37 1934.37,1429.37 2038.73,1325 MUX16_31.13 ; P9.8 P9.7
SYS_RESETN: P9.10
V3_3D: C2.2 C3.2 C6.2 C7.2 C10.2 C11.2 C13.2 INA_4F.6 INA_42.6 INA_43.6 P9.3 P9.4 PMDC.5 R1.2 R2.2 TMP_4C.8 | length 6113.2
  Top Layer w10: PMDC.5 575,690 575,1015 775,1215 v1(775,1550) 860,1550 1010,1700 v1(1010,1835) 1075,1900 1370,1900 v1(1505,1765)
  Bottom Layer w10: PMDC.5 385,640 385,1015 410,1040 500,1040 704.37,1244.37 INA_4F.6@704.37,1312.5 ; C10.2 C11.2 705,1610 714.69,1619.69 C13.2 ; TMP_4C.8@714.69,1716.3 TMP_4C.8 715,1655.31 C13.2 ; C13.2@715,1654.68 C13.2 ; v1(775,1550) R1.2 774.68,1655 C13.2 ; R2.2 815.31,1809.69 835,1790 965,1790 v1(1010,1835) ; INA_42.6@1319.68,1662.5 1372.18,1662.5 C3.2 C2.2 1460.31,1670.31 1470,1680 1470,1730 v1(1505,1765) 2045,1765 2125,1685 2125,1550 2175,1500 2175,1440 2215,1400 2325,1400 2390,1465 C7.2 ; INA_43.6 2442.81,1600 C6.2
  Bottom Layer w15: C6.2 2502.82,1597.82 P9.4 P9.3
pads on no net: INA_4F.3 INA_42.3 INA_43.3 J1.2 J1.3 J1.6 MUX0_15.42 MUX0_15.44 MUX16_31.42 MUX16_31.44 P8.3 P8.4 P8.5 P8.6 P8.7 P8.8 P8.9 P8.10 P8.11 P8.13 P8.14 P8.15 P8.16 P8.17 P8.18 P8.19 P8.20 P8.21 P8.22 P8.23 P8.24 P8.25 P8.26 P8.30 P9.5 P9.6 P9.9 P9.11 P9.13 P9.14 P9.15 P9.16 P9.17 P9.18 P9.21 P9.22 P9.24 P9.25 P9.26 P9.28 P9.29 P9.30 P9.31 P9.32 P9.33 P9.34 P9.35 P9.36 P9.41 P9.42

## Polygon pours and split planes (outlines as drawn)
GND on Top Layer "Top Overlay-No Net" (solid, pour order 2): 3150,2125 3155,2125 cw(c3155,2075) 3205,2075 3205,1380 cw(c3150,1380) 3150,1325 3125,1325 2965,1325 ccw(c2965,1275) 2915,1275 2915,1260 2915,655 ccw(c2965,655) 2965,605 2980,605 3660,605 3680,605 cw(c3680,555) 3730,555 3730,225 3715,135 3655,40 3560,-15 3480,-25 835,-25 700,-10 565,50 455,145 375,265 335,390 330,525 330,1605 335,1715 370,1835 440,1945 520,2025 635,2090 745,2120 855,2125 3150,2125

## Keep-outs
Keep-Out Layer:
  lines w10: 329.99,1632.5 cw(c822.5,1632.5) 822.5,2125.01 ; 330,1635 330,480 ccw(c835,480) 835,-25 3480,-25 ccw(c3480,225) 3730,225 3730,450 3730,555 ccw(c3680,555) 3680,605 3625,605 2970,605 ; 825,2125 3080,2125 3155,2125 cw(c3155,2075) 3205,2075 3205,2000 3205,1525 3205,1375 cw(c3155,1375) 3155,1325 3150,1325 2965,1325 ccw(c2965,1275) 2915,1275 2915,720 2915,655 ccw(c2965,655) 2965,605 2980,605

## Silkscreen, mask and mechanical layers (free items; w line width, h text height)
Top Overlay:
  drawing of 16 lines, arcs and shapes, not listed
  text "." at 3105,2030 h30
  text "1" at 445,1690 h25 r270
  text "1" at 445,1360 h25 r270
  text "1" at 445,1050 h25 r270
  text "AfternoonCape" at 1705,930 h60
  text "Rev A2" at 1705,830 h60

## Text inside footprints (layer, text, board x,y; h text height)
IN: Top Overlay "2" at 395,255 h30; Top Overlay "1" at 400,355 h30; Top Overlay "64" at 3660,255 h30; Top Overlay "63" at 3660,355 h30
INA_4F: Bottom Overlay "*" at 600,1495.63 h25 r90
INA_42: Bottom Overlay "*" at 1215,1850 h30 r90
INA_43: Bottom Overlay "*" at 2220,1787.5 h30 r90
MUX0_15: Bottom Overlay "*" at 984,1016.89 h50 r180
MUX16_31: Bottom Overlay "*" at 1944,1016.89 h50 r180
P8: Top Overlay "45" at 640,135 h25; Top Overlay "46" at 640,35 h25; Bottom Overlay "1" at 3040,140 h25; Bottom Overlay "2" at 3045,40 h25; Bottom Overlay "46" at 685,35 h25; Bottom Overlay "45" at 685,135 h25
P9: Top Overlay "46" at 640,1935 h25; Top Overlay "45" at 640,2035 h25; Bottom Overlay "45" at 685,2035 h25; Bottom Overlay "46" at 685,1935 h25; Bottom Overlay "2" at 3045,1940 h25; Bottom Overlay "1" at 3040,2040 h25
TMP_4C: Bottom Overlay "*" at 605,1695 h25 r180